# Altium PCB Master.PcbDoc (part 3 of 4)
Units mm, origin at the board's own origin, x right, y up, seen from the top; angles counter-clockwise.
Board outline 150 x 100 mm, 4 copper layers (Top Layer, GND-Layer, PWR-Layer, Bottom Layer), stack 1.586 mm thick; 231 components, 152 nets, 715 pads, 841 vias.
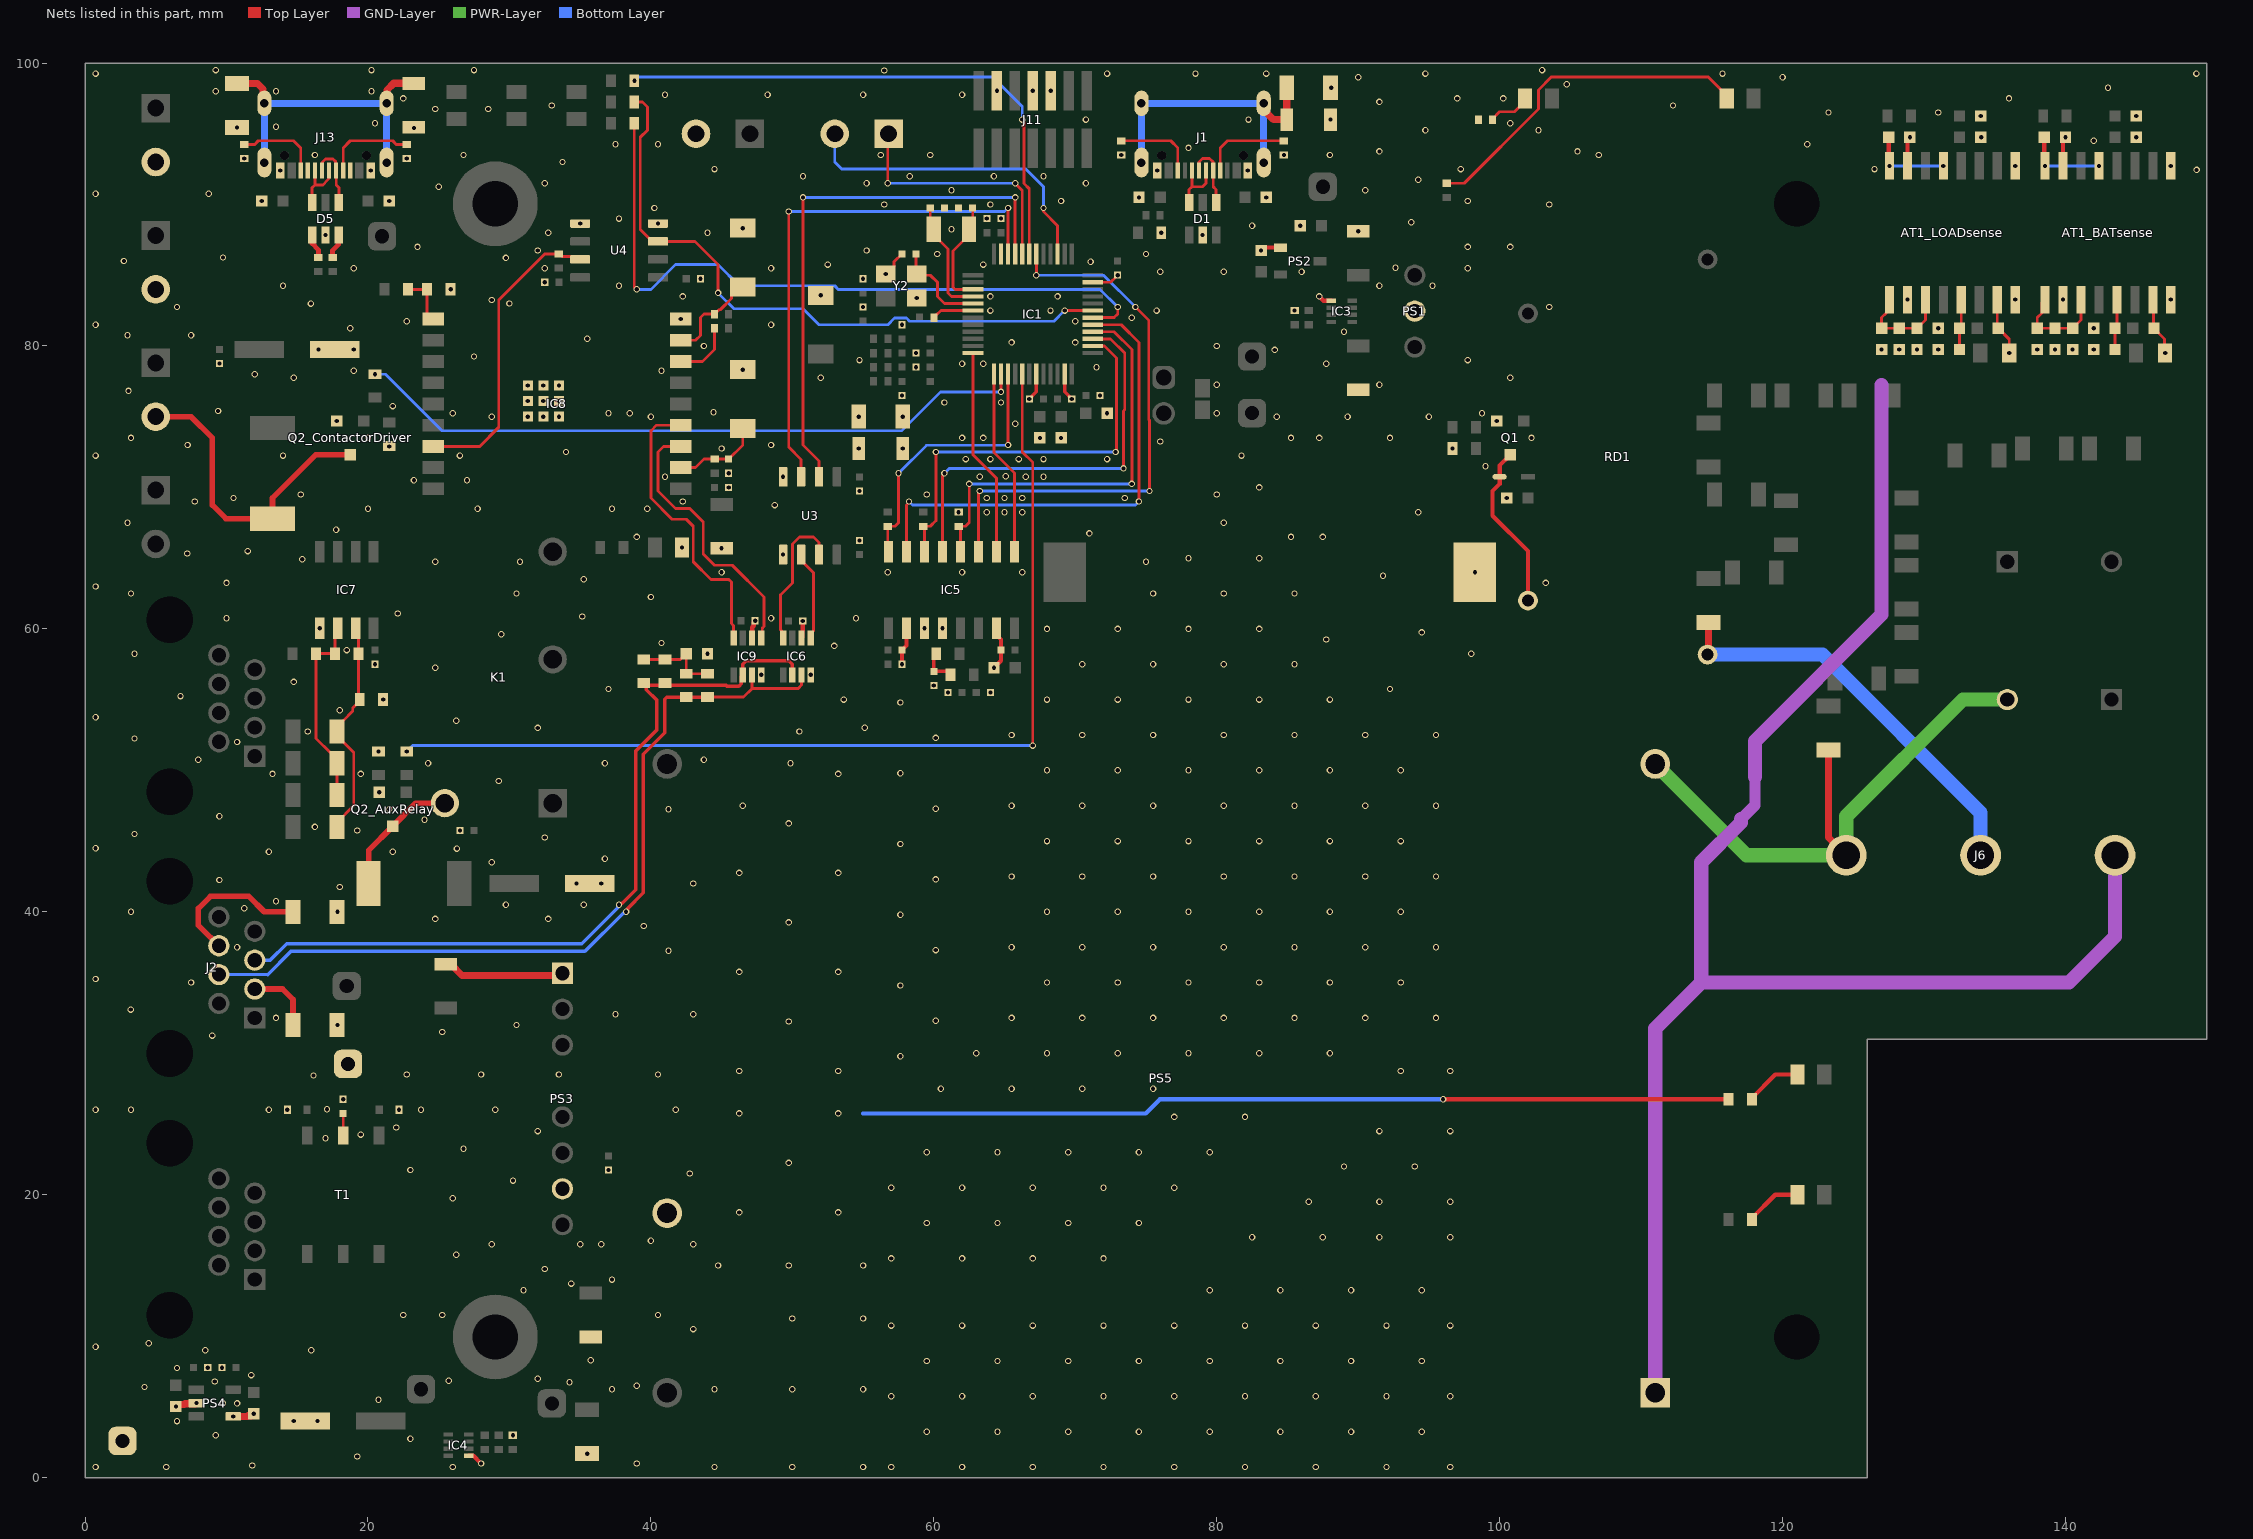
[diagram p4: the nets of this part, all layers, seen from the top]

## Via types
v1: diameter 0.45, hole 0.3, Top Layer to Bottom Layer, tented both sides, 841 vias

## Nets (pads, with @x,y where several pads share a name; then routed paths per layer and width w, separated by ;. In a path a pad name is that pad's centre, name@x,y a point inside that pad or via, vN(x,y) a via of type N, cw(c..) or ccw(c..) an arc to the next point about the centre after c; other vN are vias at no path point) (continued)
NetD5_1: (continued)
  Top Layer w0.341: D5.1@16.05,87.85 16.05,87.25 16.5,86.8 R63.1@16.5,86.25
NetD5_3: D5.3 R61.1 | length 1.8
  Top Layer w0.341: R61.1@17.5,86.25 17.5,86.75 17.929,87.179 17.929,87.829 D5.3@17.95,87.85
NetD5_4: D5.4 J13.A7 J13.B7 | length 4.7
  Top Layer w0.2: J13.A7@16.75,92.395 16.788,92.433 16.788,93.006 16.996,93.215 17.535,93.215 17.726,93.024 17.726,92.419 J13.B7@17.75,92.395 ; J13.B7@17.764,92.381 17.764,91.373 17.95,91.188 D5.4@17.95,90.15
NetD5_6: D5.6 J13.A6 J13.B6 | length 4.1
  Top Layer w0.2: D5.6@16.05,90.15 16.05,91.188 16.25,91.388 ; J13.B6@16.25,92.395 16.25,91.388 ; J13.A6@17.25,92.395 17.25,91.825 17.15,91.725 17.15,91.721 16.816,91.388 16.25,91.388
NetD6_AuxRelay_2: D6_AuxRelay.2 K1.5 Q2_AuxRelay.3 | length 9.1
  Top Layer w0.4: D6_AuxRelay.2@20.045,42 20.045,44.345 Q2_AuxRelay.3@21.75,46.05 23.38,47.68 K1.5@25.44,47.68
NetJ1_A5: J1.A5 R3.2 | length 6.3
  Top Layer w0.2: J1.A5@80.25,92.395 80.25,94 80.75,94.5 R3.2@84.75,94.5
NetJ1_B5: J1.B5 R5.2 | length 5.8
  Top Layer w0.2: R5.2@73.25,94.5 76.75,94.5 77.25,94 J1.B5@77.25,92.395
NetJ13_A5: J13.A5 R60.2 | length 6.4
  Top Layer w0.2: J13.A5@18.25,92.395 18.25,94 18.75,94.5 21.75,94.5 22,94.25 R60.2@22.75,94.25
NetJ13_B5: J13.B5 R62.2 | length 5.9
  Top Layer w0.2: R62.2@11.25,94.25 12,94.25 12.25,94.5 14.75,94.5 15.25,94 J13.B5@15.25,92.395
NetLED1_2: LED1.2 R7.2 | length 24.4
  Top Layer w0.2: R7.2@96.25,91.5 97.5,91.5 102.75,96.75 102.75,98.104 103.646,99 114.75,99 116.05,97.7 LED1.2@116.05,97.5
NetLED2_2: LED2.2 R8.2 | length 3.1
  Top Layer w0.2: R8.2@99.5,96 99.5,96.05 100,96.55 101.05,96.55 101.8,97.3 LED2.2@101.8,97.5
NetLED3_2: LED3.2 R17.1 | length 4
  Top Layer w0.3: R17.1@117.827,18.25 117.827,18.35 119.477,20 LED3.2@121.05,20
NetLED4_2: LED4.2 R18.1 | length 4
  Top Layer w0.3: R18.1@117.827,26.75 117.827,26.85 119.477,28.5 LED4.2@121.05,28.5